# EAGLE board mysz_druk (EAGLE 8.2.1)
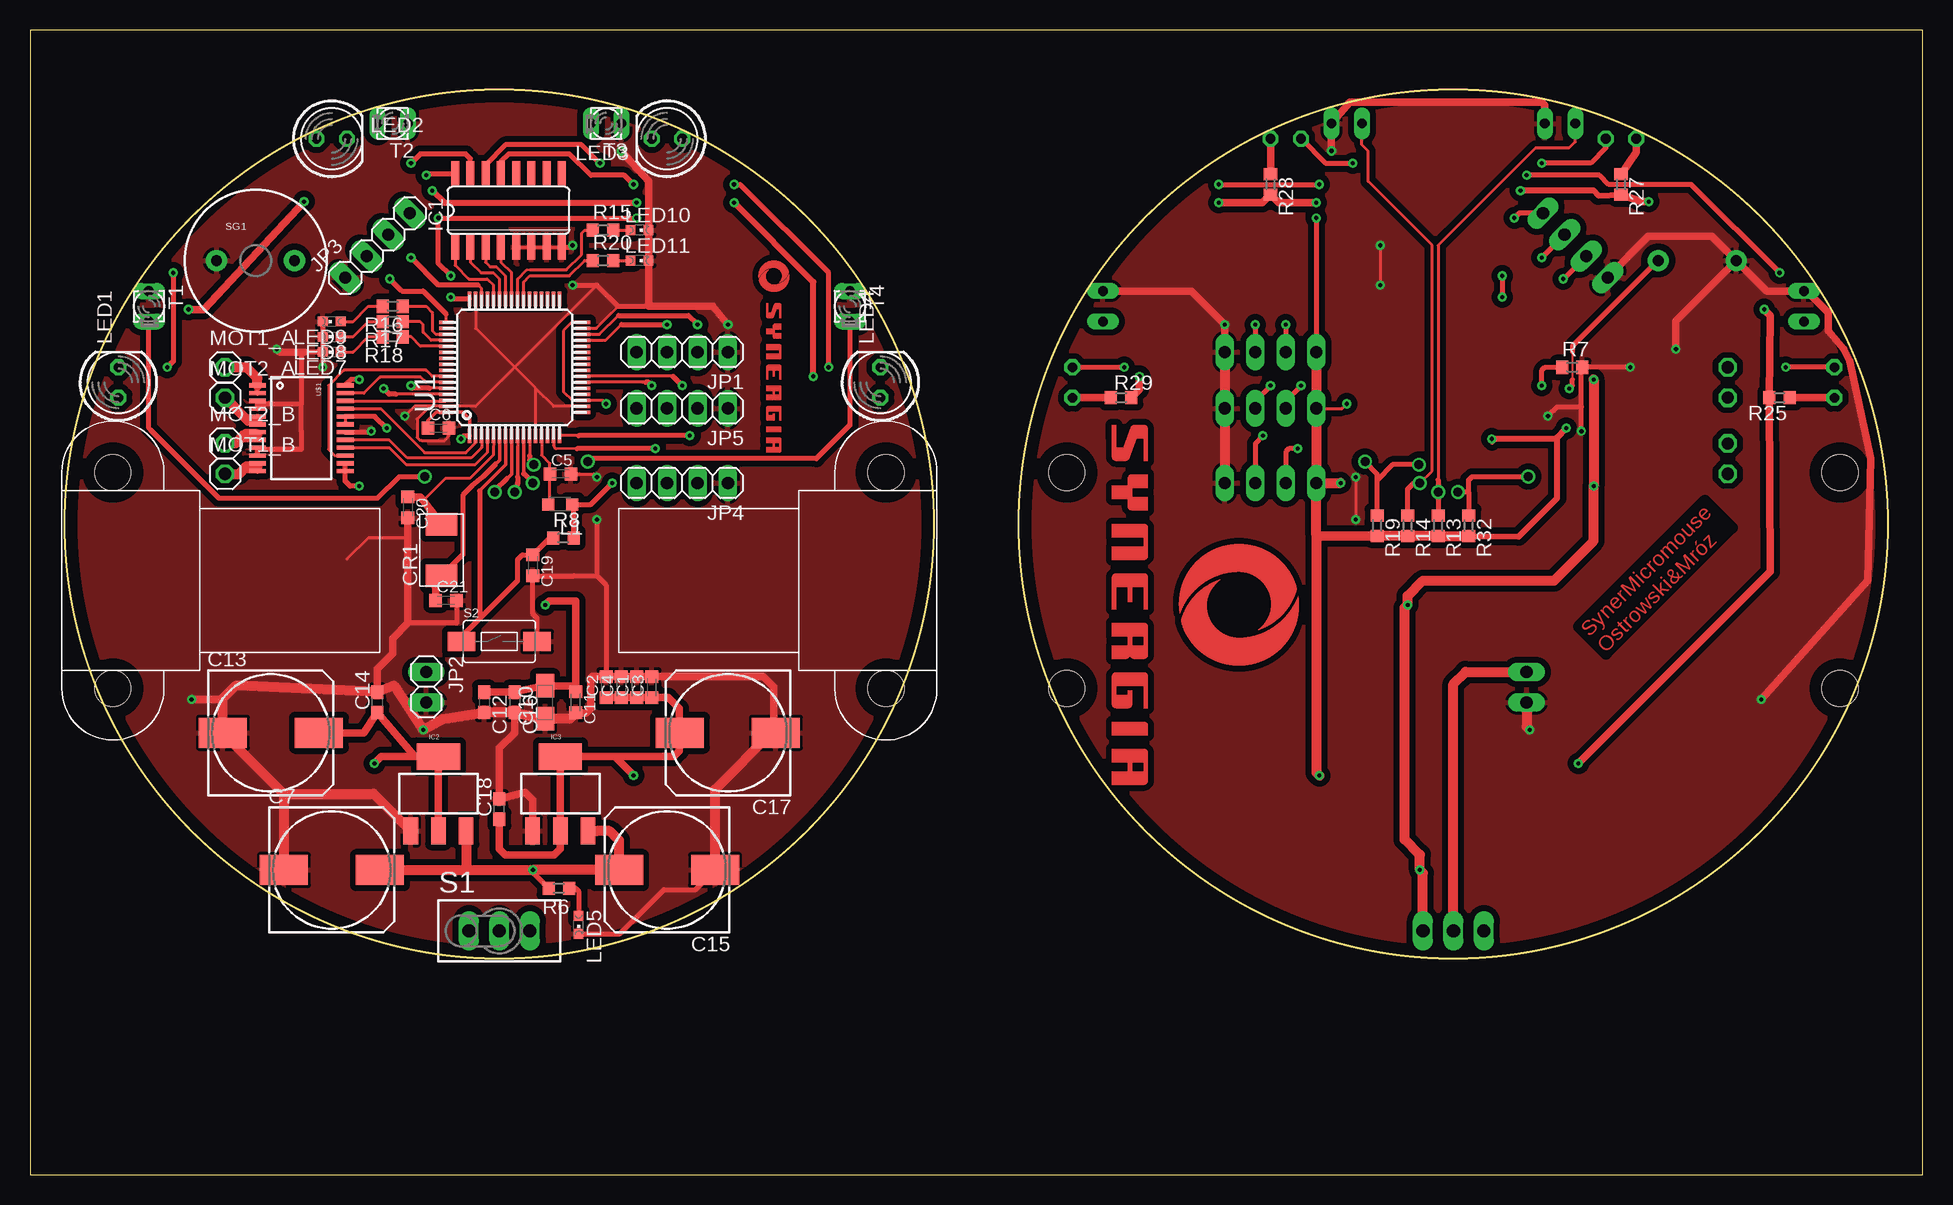
[diagram p0: board, top side]
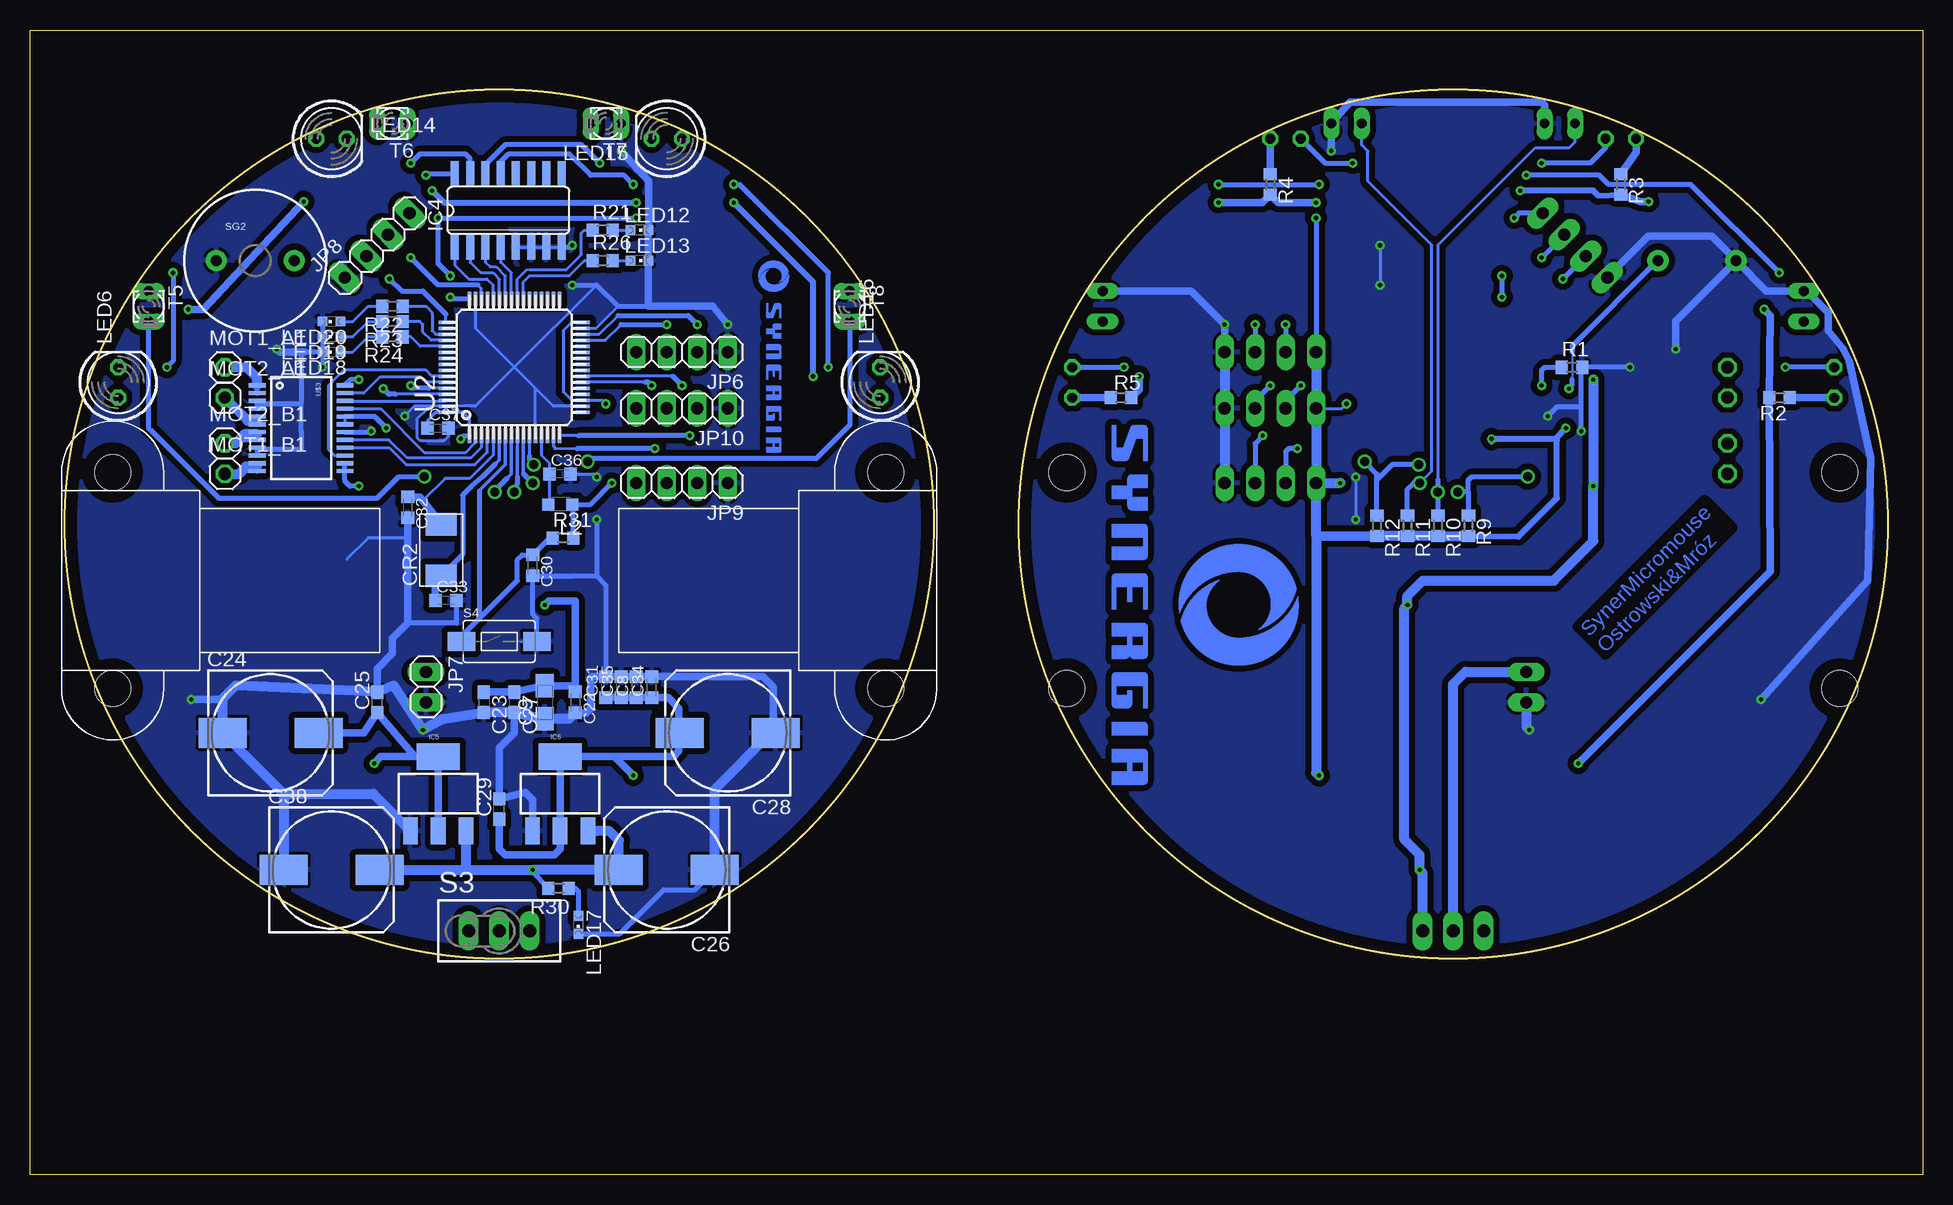
[diagram p1: board, bottom side, seen from below]

Size 157.71 x 95.43 mm. Coordinates in mm from the lower left corner, seen from the top.
Outline: 0,0 157.71,0 157.71,95.43 0,95.43 0,0
Outline: circle at 39.12,54.23 radius 36.22
Outline: circle at 118.62,54.23 radius 36.22
Copper layers (1*16): Top 0.035mm / dielectric 1.5mm / Bottom 0.035mm
Design rules "default": minimum track width 6mil, minimum drill 0.35mm, track to track 6mil, track to pad 6mil, pad to pad 6mil, via to via 6mil, smd to smd 6mil, copper to edge 40mil, drill to drill 6mil, minimum pad ring 10mil, minimum via ring 8mil, stop-mask expansion 4mil, vias tented up to drill 0mil, thermal gap 10mil

## Footprints (pad centres in the part's own frame; a part is rotated, then mirrored left to right if it is on the bottom)
C0603K = smd 1.05 x 1.08: 1 -0.875,0; 2 0.875,0
153CLV-1010 = smd 4 x 2.5: + 4,0; - -4,0
A/3216-18R = smd 1.95 x 1.5: + 1.375,0; - -1.375,0
C0603 = smd 1.1 x 1: 1 -0.85,0; 2 0.85,0
ABM7 = smd 1.9 x 2.6: P$1 -2.15,0; P$2 2.15,0
SO16 = smd 0.66 x 2.032: 1 -4.445,-3.073; 2 -3.175,-3.073; 3 -1.905,-3.073; 4 -0.635,-3.073; 5 0.635,-3.073; 6 1.905,-3.073; 7 3.175,-3.073; 8 4.445,-3.073; 9 4.445,3.073; 10 3.175,3.073; 11 1.905,3.073; 12 0.635,3.073; 13 -0.635,3.073; 14 -1.905,3.073; 15 -3.175,3.073; 16 -4.445,3.073
SOT223 = smd 1.219 x 2.235: 1 -2.311,-3.099; 2 0,-3.099; 3 2.311,-3.099 | smd 3.6 x 2.2: 4 0,3.099
1X04 = drill 1.016 long: 1 -3.81,0; 2 -1.27,0; 3 1.27,0; 4 3.81,0
1X02 = drill 1.016 long: 1 -1.27,0; 2 1.27,0
L2012C = smd 1 x 1: 1 -1,0; 2 1,0
LED5MM = drill 0.813 octagon: A -1.27,0; K 1.27,0
CHIPLED_0603 = smd 0.8 x 0.8: A 0,-0.75; C 0,0.75
1X01 = drill 1.016 octagon: 1 0,0
R0603 = smd 1 x 1.1: 1 -0.85,0; 2 0.85,0
TL3XPO = drill 1.1 pad 1.422 long: 1 -2.54,0; 2 0,0; 3 2.54,0
TACTILE-SWITCH-1101NE = smd 2.3 x 1.6: P$1 -3.15,0; P$2 3.15,0
BUZZER-12MM = drill 0.9 pad 1.778: + 3.25,0; - -3.25,0
BPX81 = drill 0.813 long: C 1.27,0; E -1.27,0
TQFP64 = smd 1.2 x 0.3: 1 -5.7,3.75; 2 -5.7,3.25; 3 -5.7,2.75; 4 -5.7,2.25; 5 -5.7,1.75; 6 -5.7,1.25; 7 -5.7,0.75; 8 -5.7,0.25; 9 -5.7,-0.25; 10 -5.7,-0.75; 11 -5.7,-1.25; 12 -5.7,-1.75; 13 -5.7,-2.25; 14 -5.7,-2.75; 15 -5.7,-3.25; 16 -5.7,-3.75; 33 5.7,-3.75; 34 5.7,-3.25; 35 5.7,-2.75; 36 5.7,-2.25; 37 5.7,-1.75; 38 5.7,-1.25; 39 5.7,-0.75; 40 5.7,-0.25; 41 5.7,0.25; 42 5.7,0.75; 43 5.7,1.25; 44 5.7,1.75; 45 5.7,2.25; 46 5.7,2.75; 47 5.7,3.25; 48 5.7,3.75 | smd 0.3 x 1.2: 17 -3.75,-5.7; 18 -3.25,-5.7; 19 -2.75,-5.7; 20 -2.25,-5.7; 21 -1.75,-5.7; 22 -1.25,-5.7; 23 -0.75,-5.7; 24 -0.25,-5.7; 25 0.25,-5.7; 26 0.75,-5.7; 27 1.25,-5.7; 28 1.75,-5.7; 29 2.25,-5.7; 30 2.75,-5.7; 31 3.25,-5.7; 32 3.75,-5.7; 49 3.75,5.7; 50 3.25,5.7; 51 2.75,5.7; 52 2.25,5.7; 53 1.75,5.7; 54 1.25,5.7; 55 0.75,5.7; 56 0.25,5.7; 57 -0.25,5.7; 58 -0.75,5.7; 59 -1.25,5.7; 60 -1.75,5.7; 61 -2.25,5.7; 62 -2.75,5.7; 63 -3.25,5.7; 64 -3.75,5.7
SSOP24 = smd 0.348 x 1.397: 1 -3.575,-3.656; 2 -2.925,-3.656; 3 -2.275,-3.656; 4 -1.625,-3.656; 5 -0.975,-3.656; 6 -0.325,-3.656; 7 0.325,-3.656; 8 0.975,-3.656; 9 1.625,-3.656; 10 2.275,-3.656; 11 2.925,-3.656; 12 3.575,-3.656; 13 3.575,3.656; 14 2.925,3.656; 15 2.275,3.656; 16 1.625,3.656; 17 0.975,3.656; 18 0.325,3.656; 19 -0.325,3.656; 20 -0.975,3.656; 21 -1.625,3.656; 22 -2.275,3.656; 23 -2.925,3.656; 24 -3.575,3.656
HP_NM = hole 3: -9,-3; 9,-3

## Placement (x,y rotation side)
C1  100nF  [C0603K]  50.55,40.64 90 top
C2  100nF  [C0603K]  48.01,40.64 90 top
C3  100nF  [C0603K]  51.82,40.64 90 top
C4  100nF  [C0603K]  49.28,40.64 90 top
C5  100nF  [C0603K]  44.2,58.42 0 top
C6  100nF  [C0603K]  34.04,62.23 0 top
C7  100uF  [153CLV-1010]  25.15,25.4 0 top
C8  100nF  [C0603K]  107.19,40.64 90 bottom
C9  10uF  [A/3216-18R]  114.81,39.37 90 bottom
C10  10uF  [A/3216-18R]  42.93,39.37 90 top
C11  100nF  [C0603K]  45.47,39.37 270 top
C12  100nF  [C0603]  37.85,39.37 270 top
C13  33uF  [153CLV-1010]  20.07,36.83 0 top
C14  100nF  [C0603]  28.96,39.37 90 top
C15  47uF  [153CLV-1010]  53.09,25.4 180 top
C16  100nF  [C0603]  40.39,39.37 270 top
C17  10uF  [153CLV-1010]  58.17,36.83 180 top
C18  100nF  [C0603]  39.12,30.48 90 top
C19  100nF  [C0603K]  41.91,50.8 270 top
C20  20pF  [C0603K]  31.5,55.63 270 top
C21  20pF  [C0603K]  34.67,47.88 0 top
C22  100nF  [C0603K]  112.27,39.37 270 bottom
C23  100nF  [C0603]  119.89,39.37 270 bottom
C24  33uF  [153CLV-1010]  137.67,36.83 0 bottom
C25  100nF  [C0603]  128.78,39.37 90 bottom
C26  47uF  [153CLV-1010]  104.65,25.4 180 bottom
C27  100nF  [C0603]  117.35,39.37 270 bottom
C28  10uF  [153CLV-1010]  99.57,36.83 180 bottom
C29  100nF  [C0603]  118.62,30.48 90 bottom
C30  100nF  [C0603K]  115.82,50.8 270 bottom
C31  100nF  [C0603K]  109.73,40.64 90 bottom
C32  20pF  [C0603K]  126.24,55.63 270 bottom
C33  20pF  [C0603K]  123.06,47.88 0 bottom
C34  100nF  [C0603K]  105.92,40.64 90 bottom
C35  100nF  [C0603K]  108.46,40.64 90 bottom
C36  100nF  [C0603K]  113.54,58.42 0 bottom
C37  100nF  [C0603K]  123.7,62.23 0 bottom
C38  100uF  [153CLV-1010]  132.59,25.4 0 bottom
CR1  8MHz  [ABM7]  34.29,52.07 90 top
CR2  8MHz  [ABM7]  123.44,52.07 90 bottom
IC1  ULN2003AD  [SO16]  39.88,80.39 0 top
IC2  [SOT223]  34.04,31.75 0 top
IC3  [SOT223]  44.2,31.75 0 top
IC4  ULN2003AD  [SO16]  117.86,80.39 0 bottom
IC5  [SOT223]  123.7,31.75 0 bottom
IC6  [SOT223]  113.54,31.75 0 bottom
JP1  [1X04]  54.36,68.58 180 top
JP2  [1X02]  33.02,40.64 270 top
JP3  [1X04]  28.96,77.47 45 top
JP4  [1X04]  54.36,57.66 180 top
JP5  [1X04]  54.36,63.88 180 top
JP6  [1X04]  103.38,68.58 180 bottom
JP7  [1X02]  124.71,40.64 270 bottom
JP8  [1X04]  128.78,77.47 45 bottom
JP9  [1X04]  103.38,57.66 180 bottom
JP10  [1X04]  103.38,63.88 180 bottom
L1  10uH  [L2012C]  44.2,55.88 180 top
L2  10uH  [L2012C]  113.54,55.88 180 bottom
LED1  [LED5MM]  7.37,66.04 90 top
LED2  [LED5MM]  25.15,86.36 0 top
LED3  [LED5MM]  53.09,86.36 180 top
LED4  [LED5MM]  70.87,66.04 90 top
LED5  [CHIPLED_0603]  45.72,20.83 180 top
LED6  [LED5MM]  150.37,66.04 90 bottom
LED7  [CHIPLED_0603]  25.15,68.58 90 top
LED8  [CHIPLED_0603]  25.15,69.85 90 top
LED9  [CHIPLED_0603]  25.15,71.12 90 top
LED10  [CHIPLED_0603]  50.8,78.74 270 top
LED11  [CHIPLED_0603]  50.8,76.2 270 top
LED12  [CHIPLED_0603]  106.93,78.74 270 bottom
LED13  [CHIPLED_0603]  106.93,76.2 270 bottom
LED14  [LED5MM]  132.59,86.36 0 bottom
LED15  [LED5MM]  104.65,86.36 180 bottom
LED16  [LED5MM]  86.87,66.04 90 bottom
LED17  [CHIPLED_0603]  112.01,20.83 180 bottom
LED18  [CHIPLED_0603]  132.59,68.58 90 bottom
LED19  [CHIPLED_0603]  132.59,69.85 90 bottom
LED20  [CHIPLED_0603]  132.59,71.12 90 bottom
MOT1_A  [1X01]  16.26,67.31 0 top
MOT1_A1  [1X01]  141.48,67.31 0 bottom
MOT1_B  [1X01]  16.26,58.42 0 top
MOT1_B1  [1X01]  141.48,58.42 0 bottom
MOT2_A  [1X01]  16.26,64.77 0 top
MOT2_A1  [1X01]  141.48,64.77 0 bottom
MOT2_B  [1X01]  16.26,60.96 0 top
MOT2_B1  [1X01]  141.48,60.96 0 bottom
R1  100k  [R0603]  29.21,67.31 0 bottom
R2  100R  [R0603]  11.94,64.77 180 bottom
R3  100R  [R0603]  25.15,82.55 270 bottom
R4  100R  [R0603]  54.36,82.55 270 bottom
R5  100R  [R0603]  66.8,64.77 0 bottom
R6  1.1k  [R0603]  44.07,23.88 180 top
R7  100k  [R0603]  128.52,67.31 0 top
R8  100k  [R0603]  44.45,53.09 0 top
R9  22k  [R0603]  37.85,54.1 270 bottom
R10  22k  [R0603]  40.39,54.1 270 bottom
R11  22k  [R0603]  42.93,54.1 270 bottom
R12  22k  [R0603]  45.47,54.1 270 bottom
R13  22k  [R0603]  117.35,54.1 270 top
R14  22k  [R0603]  114.81,54.1 270 top
R15  680R  [R0603]  47.75,78.74 0 top
R16  680R  [R0603]  30.23,72.39 180 top
R17  680R  [R0603]  30.23,71.12 180 top
R18  680R  [R0603]  30.23,69.85 180 top
R19  22k  [R0603]  112.27,54.1 270 top
R20  680R  [R0603]  47.75,76.2 0 top
R21  680R  [R0603]  109.98,78.74 0 bottom
R22  680R  [R0603]  127.51,72.39 180 bottom
R23  680R  [R0603]  127.51,71.12 180 bottom
R24  680R  [R0603]  127.51,69.85 180 bottom
R25  100R  [R0603]  145.8,64.77 180 top
R26  680R  [R0603]  109.98,76.2 0 bottom
R27  100R  [R0603]  132.59,82.55 270 top
R28  100R  [R0603]  103.38,82.55 270 top
R29  100R  [R0603]  90.93,64.77 0 top
R30  1.1k  [R0603]  113.67,23.88 180 bottom
R31  100k  [R0603]  113.28,53.09 0 bottom
R32  22k  [R0603]  119.89,54.1 270 top
S1  TL32PO  [TL3XPO]  39.12,20.32 0 top
S2  SWITCH-MOMENTARY-2-SMD-1101NE  [TACTILE-SWITCH-1101NE]  39.12,44.45 0 top
S3  TL32PO  [TL3XPO]  118.62,20.32 0 bottom
S4  SWITCH-MOMENTARY-2-SMD-1101NE  [TACTILE-SWITCH-1101NE]  118.62,44.45 0 bottom
SG1  BUZZERPTH  [BUZZER-12MM]  18.8,76.2 0 top
SG2  BUZZERPTH  [BUZZER-12MM]  138.94,76.2 0 bottom
T1  BPX81  [BPX81]  9.91,72.39 270 top
T2  BPX81  [BPX81]  30.23,87.63 180 top
T3  BPX81  [BPX81]  48.01,87.63 180 top
T4  BPX81  [BPX81]  68.33,72.39 270 top
T5  BPX81  [BPX81]  147.83,72.39 270 bottom
T6  BPX81  [BPX81]  127.51,87.63 180 bottom
T7  BPX81  [BPX81]  109.73,87.63 180 bottom
T8  BPX81  [BPX81]  89.41,72.39 270 bottom
U1  STM32F10XRXT6  [TQFP64]  40.39,67.31 90 top
U2  STM32F10XRXT6  [TQFP64]  117.35,67.31 90 bottom
U$1  TB6621FNG  [SSOP24]  22.61,62.23 270 top
U$2  [SYNERGIA_LOGO_V_30MM]  67.56,47.5 270 bottom
U$3  TB6621FNG  [SSOP24]  135.13,62.23 270 bottom
U$4  [HP_NM]  9.91,49.53 270 top
U$5  [HP_NM]  68.33,49.53 90 top
U$6  [SYNERGIA_LOGO_H_16MM]  61.98,74.93 270 top
U$7  [HP_NM]  147.83,49.53 270 bottom
U$8  [HP_NM]  89.41,49.53 90 bottom
U$9  [SYNERGIA_LOGO_V_30MM]  90.17,47.5 270 top
U$10  [SYNERGIA_LOGO_H_16MM]  95.76,74.93 270 bottom

## Library data of the parts
C1-C6 C8 C11 C19-C22 C30-C37 R1 R6-R8 R15-R18 R20-R24 R26 R30 R31 = resistor
C7 C9 C10 C12-C18 C23-C29 C38 L1 L2 R2-R5 R9-R14 R19 R25 R27-R29 R32 = rcl
CR1 CR2 = crystal_scorpio
IC1 IC4 = uln-udn
IC2 IC3 IC5 IC6 S2 S4 SG1 SG2 U$1 U$3 = SparkFun
JP1-JP10 MOT1_A MOT1_A1 MOT1_B MOT1_B1 MOT2_A MOT2_A1 MOT2_B MOT2_B1 = pinhead
LED1-LED20 = led
S1 S3 = switch
T1-T8 = opto-trans-siemens; OC_FARNELL: unknown; OC_NEWARK: unknown
U1 U2 = stm32
U$2 U$6 U$9 U$10 = synergia_logo
U$4 U$5 U$7 U$8 = PololuMG_v2

## Nets
+3V1: C8.1 C28.+ C29.1 C31.1 C34.1 C35.1 C37.1 IC6.2 IC6.4 JP6.4 JP8.4 JP9.4 JP10.4 L2.1 R13.2 R14.2 R19.2 R31.2 R32.2 U2.1 U2.19 U2.32 U2.48 U2.64 U$3.19 U$3.20
+3V3: C1.1 C2.1 C3.1 C4.1 C6.1 C17.+ C18.1 IC3.2 IC3.4 JP1.4 JP3.4 JP4.4 JP5.4 L1.1 R8.2 R9.2 R10.2 R11.2 R12.2 U1.1 U1.19 U1.32 U1.48 U1.64 U$1.19 U$1.20
+5V: C13.+ C14.1 IC2.2 IC2.4 R2.2 R3.2 R4.2 R5.2
+5V1: C24.+ C25.1 IC5.2 IC5.4 R25.2 R27.2 R28.2 R29.2
BAT+: JP2.1 S1.2
BAT+1: JP7.1 S3.2
BUZZER: SG1.+ U1.61
BUZZER1: SG2.+ U2.61
CZ1: IC1.1 U1.44
CZ1_OUT: R9.1 T1.C U1.8
CZ1_OUT1: R32.1 T5.C U2.8
CZ2: IC1.2 U1.43
CZ2_OUT: R10.1 T2.C U1.9
CZ2_OUT1: R13.1 T6.C U2.9
CZ3: IC1.3 U1.42
CZ3_OUT: R11.1 T3.C U1.10
CZ3_OUT1: R14.1 T7.C U2.10
CZ4: IC1.4 U1.41
CZ4_OUT: R12.1 T4.C U1.11
CZ4_OUT1: R19.1 T8.C U2.11
CZ5: IC4.1 U2.44
CZ6: IC4.2 U2.43
CZ7: IC4.3 U2.42
CZ8: IC4.4 U2.41
ENC1_A: JP4.3 U1.15
ENC1_A1: JP9.3 U2.15
ENC1_B: JP4.2 U1.16
ENC1_B1: JP9.2 U2.16
ENC2_A: JP5.3 U1.22
ENC2_A1: JP10.3 U2.22
ENC2_B: JP5.2 U1.23
ENC2_B1: JP10.2 U2.23
GND: C1.2 C2.2 C3.2 C4.2 C5.2 C6.2 C7.- C10.- C11.2 C12.2 C13.- C14.2 C15.- C16.2 C17.- C18.2 C19.2 C20.2 C21.2 IC1.5 IC1.6 IC1.7 IC1.8 IC2.1 IC3.1 JP1.1 JP2.2 JP3.1 JP4.1 JP5.1 LED5.C LED7.C LED8.C LED9.C LED10.C LED11.C R1.2 S2.P$2 SG1.- T1.E T2.E T3.E T4.E U1.12 U1.18 U1.31 U1.47 U1.63 U$1.3 U$1.4 U$1.9 U$1.10 U$1.18
GND1: C8.2 C9.- C22.2 C23.2 C24.- C25.2 C26.- C27.2 C28.- C29.2 C30.2 C31.2 C32.2 C33.2 C34.2 C35.2 C36.2 C37.2 C38.- IC4.5 IC4.6 IC4.7 IC4.8 IC5.1 IC6.1 JP6.1 JP7.2 JP8.1 JP9.1 JP10.1 LED12.C LED13.C LED17.C LED18.C LED19.C LED20.C R7.2 S4.P$2 SG2.- T5.E T6.E T7.E T8.E U2.12 U2.18 U2.31 U2.47 U2.63 U$3.3 U$3.4 U$3.9 U$3.10 U$3.18
IN1_A: U1.2 U$1.21
IN1_A1: U2.2 U$3.21
IN1_B: U1.3 U$1.17
IN1_B1: U2.3 U$3.17
IN2_A: U1.62 U$1.22
IN2_A1: U2.62 U$3.22
IN2_B: U1.4 U$1.16
IN2_B1: U2.4 U$3.16
LED1: R20.1 U1.39
LED2: R15.1 U1.40
LED3: R16.1 U1.51
LED4: R17.1 U1.52
LED5: R18.1 U1.53
LED6: R21.1 U2.40
LED7: R22.1 U2.51
LED8: R23.1 U2.52
LED9: R24.1 U2.53
LED10: R26.1 U2.39
N$1: R1.1 U1.60
N$2: C5.1 L1.2 U1.13
N$3: LED7.A R18.2
N$4: LED8.A R17.2
N$5: LED9.A R16.2
N$6: LED10.A R15.2
N$7: LED5.A R6.1
N$8: IC1.16 LED1.K
N$9: MOT1_A.1 U$1.1 U$1.2
N$10: MOT2_A.1 U$1.5 U$1.6
N$11: MOT2_B.1 U$1.7 U$1.8
N$12: MOT1_B.1 U$1.11 U$1.12
N$13: IC1.15 LED2.K
N$14: IC1.14 LED3.K
N$15: IC1.13 LED4.K
N$16: R7.1 U2.60
N$17: LED1.A R2.1
N$18: LED2.A R3.1
N$19: LED3.A R4.1
N$20: LED4.A R5.1
N$21: C36.1 L2.2 U2.13
N$22: MOT1_A1.1 U$3.1 U$3.2
N$23: C20.1 CR1.P$2 U1.5
N$24: C21.1 CR1.P$1 U1.6
N$25: MOT2_A1.1 U$3.5 U$3.6
N$26: LED11.A R20.2
N$27: MOT2_B1.1 U$3.7 U$3.8
N$28: MOT1_B1.1 U$3.11 U$3.12
N$29: IC4.16 LED6.K
N$30: IC4.15 LED14.K
N$31: IC4.14 LED15.K
N$32: IC4.13 LED16.K
N$33: LED6.A R25.1
N$34: LED14.A R27.1
N$35: LED15.A R28.1
N$36: LED16.A R29.1
N$37: C32.1 CR2.P$2 U2.5
N$38: C33.1 CR2.P$1 U2.6
N$39: LED18.A R24.2
N$40: LED19.A R23.2
N$41: LED20.A R22.2
N$42: LED12.A R21.2
N$43: LED13.A R26.2
N$44: LED17.A R30.1
PWM_A: U1.59 U$1.23
PWM_A1: U2.59 U$3.23
PWM_B: U1.58 U$1.15
PWM_B1: U2.58 U$3.15
RESET: C19.1 R8.1 S2.P$1 U1.7
RESET1: C30.1 R31.1 S4.P$1 U2.7
RX: JP1.2 U1.30
RX1: JP6.2 U2.30
SWCLK: JP3.2 U1.49
SWCLK1: JP8.2 U2.49
SWDIO: JP3.3 U1.46
SWDIO1: JP8.3 U2.46
TX: JP1.3 U1.29
TX1: JP6.3 U2.29
V+: C7.+ C10.+ C11.1 C12.1 C15.+ C16.1 IC2.3 IC3.3 R6.2 S1.3 U$1.13 U$1.14 U$1.24
V+1: C9.+ C22.1 C23.1 C26.+ C27.1 C38.+ IC5.3 IC6.3 R30.2 S3.3 U$3.13 U$3.14 U$3.24

## Tracks (layer width: path | path; a pad name or v marks a point on that pad's centre or on a via)
+3V1  (via drill 0.35)
  Top 0.152: 120.65,53.19 R32.2
  Top 0.254: JP10.4 109.35,63.88 v109.73,64.26
  Top 0.406: v121.82,61.34 121.82,61.06 | 121.26,53.19 120.65,53.19 | v122.68,74.93 v122.68,73.15 | JP8.4 124.11,80.16 v123.7,79.76 | v107.19,79.76 JP6.4
  Top 0.508: R32.2 124.05,53.19 127.25,56.39 127.25,61.21 | 127.25,61.21 127.13,61.34 | 127.13,61.34 v128.02,62.23 127.25,61.47 127.25,61.21 | 127.13,61.34 v121.82,61.34
  Top 0.813: JP6.4 JP10.4 JP9.4 | 107.19,53.34 JP9.4 | 107.19,53.34 107.19,33.53 v107.44,33.27 | JP9.4 v109.22,57.66 | R32.2 R13.2 R14.2 R19.2 107.34,53.19 107.19,53.34
  Bottom 0.152: 122.54,73.01 v122.68,73.15
  Bottom 0.254: U2.32 112.58,71.06 113.28,70.36 113.28,65.28 112.57,64.56 U2.19 110.03,64.56 v109.73,64.26 | U$3.20 U$3.19
  Bottom 0.305: U2.1 121.1,62.99 121.67,63.56 U2.64 123.89,63.56 124.57,62.88 C37.1
  Bottom 0.406: U2.1 121.55,61.61 v121.82,61.34 | v109.22,57.66 111,55.88 L2.1 112.43,55.78 R31.2 | U2.48 122.54,73.01 | v122.68,74.93 123.7,75.95 v123.7,79.76 v107.19,79.76 | U$3.20 128.99,63.2 v128.02,62.23
  Bottom 0.61: C31.1 C35.1 C8.1 C34.1 104.53,39.77 103.63,38.86 103.63,36.89 C28.+ 103.63,36.77 103.63,35.31 104.09,34.85 IC6.4 | C29.1 118.62,27.18 118.11,26.67 114.05,26.67 113.54,27.18 IC6.2 IC6.4 | IC6.4 109.02,34.85 v107.44,33.27
+3V3  (via drill 0.35)
  Top 0.152: 35.19,73.01 v35.05,73.15
  Top 0.254: U1.32 45.15,71.06 44.45,70.36 44.45,65.28 45.17,64.56 U1.19 47.71,64.56 v48.01,64.26 | U$1.20 U$1.19
  Top 0.305: U1.1 36.64,62.99 36.07,63.56 U1.64 33.84,63.56 33.16,62.88 C6.1
  Top 0.406: U1.1 36.19,61.61 v35.92,61.34 | v48.51,57.66 46.74,55.88 L1.1 45.3,55.78 R8.2 | U1.48 35.19,73.01 | v35.05,74.93 34.04,75.95 v34.04,79.76 v50.55,79.76 | U$1.20 28.74,63.2 v29.72,62.23
  Top 0.61: C2.1 C4.1 C1.1 C3.1 53.2,39.77 54.1,38.86 54.1,36.89 C17.+ 54.1,36.77 54.1,35.31 53.65,34.85 IC3.4 | C18.1 39.12,27.18 39.62,26.67 43.69,26.67 44.2,27.18 IC3.2 IC3.4 | IC3.4 48.72,34.85 v50.29,33.27
  Bottom 0.152: 37.08,53.19 R9.2
  Bottom 0.254: JP5.4 48.39,63.88 v48.01,64.26
  Bottom 0.406: v35.92,61.34 35.92,61.06 | 36.47,53.19 37.08,53.19 | v35.05,74.93 v35.05,73.15 | JP3.4 33.63,80.16 v34.04,79.76 | v50.55,79.76 JP1.4
  Bottom 0.508: R9.2 33.68,53.19 30.48,56.39 30.48,61.21 | 30.48,61.21 30.61,61.34 | 30.61,61.34 v29.72,62.23 30.48,61.47 30.48,61.21 | 30.61,61.34 v35.92,61.34
  Bottom 0.813: JP1.4 JP5.4 JP4.4 | 50.55,53.34 JP4.4 | 50.55,53.34 50.55,33.53 v50.29,33.27 | JP4.4 v48.51,57.66 | R9.2 R10.2 R11.2 R12.2 50.39,53.19 50.55,53.34
+5V  (via drill 0.35)
  Top 0.508: v33.53,82.04 34.54,81.03 v50.55,81.03 | v58.67,81.03 65.28,74.42 v65.28,66.55
  Top 0.61: C13.+ 27.82,36.83 C14.1 32.08,34.85 IC2.4 | IC2.2 IC2.4 | IC2.4 29.26,34.85 v28.7,34.29 | v13.21,72.14 14.48,72.14 v22.84,81.13
  Bottom 0.254: 50.65,81.13 v50.55,81.03
  Bottom 0.508: R3.2 27.03,81.64 27.43,82.04 v33.53,82.04 | 58.57,81.13 v58.67,81.03
  Bottom 0.61: v28.7,34.29 12.7,50.29 R2.2 12.7,71.63 v13.21,72.14 | R3.2 23.47,81.13 v22.84,81.13 | v58.67,81.03 55.03,81.03 R4.2 53.68,81.03 v50.55,81.03 | v65.28,66.55 65.28,65.44 R5.2
+5V1  (via drill 0.35)
  Top 0.254: 107.09,81.13 v107.19,81.03
  Top 0.508: R27.2 130.71,81.64 130.3,82.04 v124.21,82.04 | 99.16,81.13 v99.06,81.03
  Top 0.61: v129.03,34.29 145.03,50.29 R25.2 145.03,71.63 v144.53,72.14 | R27.2 134.26,81.13 v134.9,81.13 | v99.06,81.03 102.7,81.03 R28.2 104.05,81.03 v107.19,81.03 | v92.46,66.55 92.46,65.44 R29.2
  Bottom 0.508: v124.21,82.04 123.19,81.03 v107.19,81.03 | v99.06,81.03 92.46,74.42 v92.46,66.55
  Bottom 0.61: C24.+ 129.92,36.83 C25.1 125.66,34.85 IC5.4 | IC5.2 IC5.4 | IC5.4 128.47,34.85 v129.03,34.29 | v144.53,72.14 143.26,72.14 v134.9,81.13
BAT+
  Bottom 0.813: S1.2 39.12,40.89 38.1,41.91 JP2.1
BAT+1
  Top 0.813: S3.2 118.62,40.89 119.63,41.91 JP7.1
BUZZER  (via drill 0.35)
  Top 0.254: U1.61 30.48,65.06
  Top 0.406: v29.46,65.53 29.94,65.06 30.48,65.06
  Bottom 0.152: 29.21,68.58 29.21,66.29
  Bottom 0.406: v29.46,65.53 29.21,65.79 29.21,66.29 | SG1.+ 22.1,76.2 29.21,69.09 29.21,68.58
BUZZER1  (via drill 0.35)
  Top 0.152: 128.52,68.58 128.52,66.29
  Top 0.406: v128.27,65.53 128.52,65.79 128.52,66.29 | SG2.+ 135.64,76.2 128.52,69.09 128.52,68.58
  Bottom 0.254: U2.61 127.25,65.06
  Bottom 0.406: v128.27,65.53 127.8,65.06 127.25,65.06
CZ1
  Top 0.254: U1.44 38.64,74.14 38.1,74.68 36.58,74.68 35.43,75.82 IC1.1
CZ1_OUT  (via drill 0.75)
  Top 0.152: 10.03,62.1 9.91,62.23
  Top 0.305: U1.8 40.14,58.42 39.75,58.04
  Top 0.406: v32.89,58.19 30.76,58.19 28.96,56.39 15.75,56.39 10.03,62.1 | 9.91,62.23 T1.C | v38.73,56.9 38.73,57.02 39.75,58.04
  Bottom 0.406: v32.89,58.19 37.57,58.19 37.85,57.91 37.85,56.9 | 37.85,56.9 v38.73,56.9 | 37.85,56.9 R9.1
CZ1_OUT1  (via drill 0.75)
  Top 0.406: v124.84,58.19 120.17,58.19 119.89,57.91 119.89,56.9 | 119.89,56.9 v119,56.9 | 119.89,56.9 R32.1
  Bottom 0.152: 147.7,62.1 147.83,62.23
  Bottom 0.305: U2.8 117.6,58.42 117.98,58.04
  Bottom 0.406: v124.84,58.19 126.97,58.19 128.78,56.39 141.99,56.39 147.7,62.1 | 147.83,62.23 T5.C | v119,56.9 119,57.02 117.98,58.04
CZ2
  Top 0.254: U1.43 39.14,74.66 38.61,75.18 37.59,75.18 36.7,76.07 IC1.2
CZ2_OUT  (via drill 0.75)
  Top 0.254: U1.9 40.64,60.71
  Top 0.305: 40.64,60.71 40.64,58.17
  Top 0.406: v40.39,56.9 40.64,57.66 40.64,58.17
  Bottom 0.254: 40.39,57.91 40.39,77.47 32.26,85.6 29.46,85.6 28.96,86.11 T2.C
  Bottom 0.406: R10.1 v40.39,56.9 40.39,57.91
CZ2_OUT1  (via drill 0.75)
  Top 0.254: 117.35,57.91 117.35,77.47 125.48,85.6 128.27,85.6 128.78,86.11 T6.C
  Top 0.406: R13.1 v117.35,56.9 117.35,57.91
  Bottom 0.254: U2.9 117.1,60.71
  Bottom 0.305: 117.1,60.71 117.1,58.17
  Bottom 0.406: v117.35,56.9 117.09,57.66 117.1,57.66 117.1,58.17
CZ3
  Top 0.254: U1.42 39.64,74.92 38.86,75.69 38.35,75.69 37.97,76.07 IC1.3
CZ3_OUT  (via drill 0.75)
  Top 0.305: U1.10 41.14,58.43
  Top 0.406: 41.14,58.43 v41.91,57.66
  Bottom 0.254: T3.C 46.74,85.85 46.23,85.34 46.23,82.8 40.89,77.47 40.89,58.67 v41.91,57.66
  Bottom 0.406: R11.1 42.93,57.15 42.42,57.66 v41.91,57.66
CZ3_OUT1  (via drill 0.75)
  Top 0.254: T7.C 111,85.85 111.51,85.34 111.51,82.8 116.84,77.47 116.84,58.67 v115.82,57.66
  Top 0.406: R14.1 114.81,57.15 115.32,57.66 v115.82,57.66
  Bottom 0.305: U2.10 116.6,58.43
  Bottom 0.406: 116.6,58.43 v115.82,57.66
CZ4
  Top 0.254: U1.41 40.14,75.18 39.24,76.07 IC1.4
CZ4_OUT  (via drill 0.75)
  Top 0.254: U1.11 41.64,59.94
  Top 0.406: 41.64,59.94 41.64,59.53 v41.99,59.18 | T4.C 68.33,62.48 65.53,59.69 46.74,59.69 v46.48,59.44
  Bottom 0.254: R12.1 45.47,57.91 45.47,58.42
  Bottom 0.406: v41.99,59.18 44.2,59.18 45.47,57.91 | R12.1 45.47,58.42 v46.48,59.44
CZ4_OUT1  (via drill 0.75)
  Top 0.254: R19.1 112.27,57.91 112.27,58.42
  Top 0.406: v115.75,59.18 113.54,59.18 112.27,57.91 | R19.1 112.27,58.42 v111.25,59.44
  Bottom 0.254: U2.11 116.1,59.94
  Bottom 0.406: 116.1,59.94 116.1,59.53 v115.75,59.18 | T8.C 89.41,62.48 92.2,59.69 111,59.69 v111.25,59.44
CZ5
  Bottom 0.254: U2.44 119.1,74.14 119.63,74.68 121.16,74.68 122.3,75.82 IC4.1
CZ6
  Bottom 0.254: U2.43 118.6,74.66 119.13,75.18 120.14,75.18 121.03,76.07 IC4.2
CZ7
  Bottom 0.254: U2.42 118.1,74.92 118.87,75.69 119.38,75.69 119.76,76.07 IC4.3
CZ8
  Bottom 0.254: U2.41 117.6,75.18 118.49,76.07 IC4.4
ENC1_A  (via drill 0.35)
  Top 0.254: U1.15 43.64,60.81 43.81,60.5 45.59,60.53
  Top 0.406: v52.09,60.53 45.59,60.53
  Bottom 0.152: JP4.3 53.09,57.91
  Bottom 0.406: v52.09,60.53 52.83,60.53 53.09,60.27 JP4.3
ENC1_A1  (via drill 0.35)
  Top 0.152: JP9.3 104.65,57.91
  Top 0.406: v105.64,60.53 104.9,60.53 104.65,60.27 JP9.3
  Bottom 0.254: U2.15 114.1,60.81 113.92,60.5 112.14,60.53
  Bottom 0.406: v105.64,60.53 112.14,60.53
ENC1_B  (via drill 0.35)
  Top 0.254: 45.72,61.61 U1.16
  Top 0.406: 45.72,61.61 v54.98,61.61 v54.99,61.62
  Bottom 0.406: v54.99,61.62 54.99,61.59 55.63,60.96 JP4.2
ENC1_B1  (via drill 0.35)
  Top 0.406: v102.74,61.62 102.74,61.59 102.11,60.96 JP9.2
  Bottom 0.254: 112.01,61.61 U2.16
  Bottom 0.406: 112.01,61.61 102.75,61.61 v102.74,61.62
ENC2_A  (via drill 0.35)
  Top 0.254: 51.31,66.06 51.05,66.06 U1.22
  Top 0.406: v51.82,65.79 51.54,66.06 51.31,66.06
  Bottom 0.406: JP5.3 53.09,64.52 v51.82,65.79
ENC2_A1  (via drill 0.35)
  Top 0.406: JP10.3 104.65,64.52 v105.92,65.79
  Bottom 0.254: 106.43,66.06 106.68,66.06 U2.22
  Bottom 0.406: v105.92,65.79 106.19,66.06 106.43,66.06
ENC2_B  (via drill 0.35)
  Top 0.254: 53.58,66.56 U1.23
  Top 0.406: v54.36,65.79 53.58,66.56
  Bottom 0.406: JP5.2 55.63,64.52 v54.36,65.79
ENC2_B1  (via drill 0.35)
  Top 0.406: JP10.2 102.11,64.52 v103.38,65.79
  Bottom 0.254: 104.15,66.56 U2.23
  Bottom 0.406: v103.38,65.79 104.15,66.56
GND  (via drill 0.35)
  Top 0.152: 40.39,67.31 42.16,65.53 42.14,65.5 U1.12 | U1.63 33.33,64.06 | 33.33,64.06 33.15,63.88 | 32.51,61.21 32.64,61.21 | 33.33,64.06 32.06,64.06
  Top 0.254: U1.47 37.14,70.56 40.39,67.31 | 40.39,67.31 37.14,64.06 U1.63 32.06,64.06 v31.24,63.25 | U1.12 42.14,65.56 40.39,67.31 | U1.18 43.64,64.06 42.16,65.53 | 22.68,61.91 22.61,61.98 | IC1.5 IC1.6 IC1.7 IC1.8 | 51.56,72.39 49.02,72.39 47.19,70.56 U1.31 | C5.2 46.99,58.42 v47.24,58.17 | 40.39,67.31 47.24,74.17 | 31.5,53.09 28.19,53.09 26.42,51.31 | 33.15,63.88 32.26,62.99 32.26,61.47 32.51,61.21 | 32.64,61.21 34.54,61.21 34.91,61.58 C6.2
  Top 0.406: LED9.C LED8.C LED7.C | U$1.3 18.95,64.26 | 18.95,64.26 U$1.4 | U$1.9 18.95,60.45 | 18.95,60.45 U$1.10 | 18.95,64.26 22.61,64.26 | 18.95,60.45 22.61,60.45 22.61,61.98 22.61,64.26 | LED7.C 22.86,68.58 22.61,68.33 22.61,64.26 | v47.24,54.61 47.24,49.94 | C2.2 48.01,49.15 47.24,49.94 | IC1.8 45.06,77.32 v45.21,77.47 | v45.21,74.17 47.24,74.17 49.02,72.39 52.07,72.39 | U$1.18 28.38,61.91 v28.45,61.98 | LED7.C 24.4,67.32 v24.38,67.31 | C21.2 35.55,47.48 35.56,45.97 31.5,45.97 | S2.P$2 42.27,46.38 41.91,46.74 C19.2 45.35,49.92 47.24,49.94 | LED5.C 49.16,20.08 52.83,23.75 55.44,23.75 C15.-
  Top 0.61: C11.2 46.37,38.49 46.74,38.86 46.74,41.4 46.85,41.52 C2.2 C4.2 C1.2 C3.2 61.1,41.52 61.98,40.64 61.98,37.02 C17.- | C16.2 40.39,36.83 39.12,35.56 C18.2 41.27,31.88 41.91,31.24 41.91,28.68 IC3.1 | 21.15,25.91 C7.- | 21.15,31.75 21.59,31.75 | C20.2 31.5,53.09 31.5,45.97 30.23,44.7 30.23,43.43 28.96,42.16 C14.2 | 22.86,68.58 20.83,68.58 v20.57,68.83 | v13.46,39.62 16,39.62 16.07,39.69 | v49.28,85.34 51.56,82.8 51.56,78.75 LED10.C LED11.C 51.55,72.4 51.56,72.39 52.07,72.39 56.9,72.39 v58.17,70.87
  Top 0.813: C11.2 44.97,37.99 C10.- 42.9,37.97 C16.2 C12.2 34.42,37.97 v32.77,37.08 30.35,40.77 C14.2 17.15,40.77 16.07,39.69 C13.- 21.15,31.75 21.15,25.91 | C15.- 57.09,32.13 61.98,37.02 | 21.59,31.75 28.63,31.75 IC2.1
  Bottom 0.152: R1.2 28.46,67 28.46,66.58
  Bottom 0.254: v45.21,77.47 v45.21,74.17 | 28.45,64.01 28.45,66.97 28.46,67 | v47.24,58.17 v47.24,54.61 47.24,54.36
  Bottom 0.406: v28.45,61.98 28.45,64.01 | 28.45,64.01 28.45,66.99 28.46,67 | 28.45,64.01 30.48,64.01 v31.24,63.25 | v24.38,67.31 R1.2
  Bottom 0.61: v20.57,68.83 20.57,71.17 SG1.- | SG1.- 13.01,73.66 T1.E 9.65,73.66 7.87,71.88 7.87,70.36 6.6,68.83 6.1,67.82 4.32,59.69 4.57,49.53 v13.46,39.62 | JP3.1 26.26,74.83 22.86,78.23 17.58,78.23 SG1.- | T2.E 31.5,89.15 31.75,89.41 47.75,89.41 T3.E v49.28,85.34 | T4.E 60.96,73.66 v58.17,70.87 JP1.1
  Bottom 0.813: JP1.1 JP5.1 JP4.1 | JP2.2 33.02,37.34 v32.77,37.08
  pour Top (isolate 0.508): 4.32,94.23 61.21,94.23 85.6,69.85 85.6,21.08 74.17,9.65 19.05,9.65 -4.83,33.53 -4.83,85.09
  pour Bottom (isolate 0.508): 1.52,97.03 61.72,97.03 91.19,67.56 91.19,18.8 78.23,5.84 16,5.84 -6.6,28.45 -6.6,88.9
GND1  (via drill 0.35)
  Top 0.152: R7.2 129.27,67 129.27,66.58
  Top 0.254: v112.52,77.47 v112.52,74.17 | 129.29,64.01 129.29,66.97 129.27,67 | v110.49,58.17 v110.49,54.61 110.49,54.36
  Top 0.406: v129.29,61.98 129.29,64.01 | 129.29,64.01 129.29,66.99 129.27,67 | 129.29,64.01 127.25,64.01 v126.49,63.25 | v133.35,67.31 R7.2
  Top 0.61: v137.16,68.83 137.16,71.17 SG2.- | SG2.- 144.73,73.66 T5.E 148.08,73.66 149.86,71.88 149.86,70.36 151.13,68.83 151.64,67.82 153.42,59.69 153.16,49.53 v144.27,39.62 | JP8.1 131.47,74.83 134.87,78.23 140.16,78.23 SG2.- | T6.E 126.24,89.15 125.98,89.41 109.98,89.41 T7.E v108.46,85.34 | T8.E 96.77,73.66 v99.57,70.87 JP6.1
  Top 0.813: JP6.1 JP10.1 JP9.1 | JP7.2 124.71,37.34 v124.97,37.08
  Bottom 0.152: 117.35,67.31 115.57,65.53 115.6,65.5 U2.12 | U2.63 124.41,64.06 | 124.41,64.06 124.59,63.88 | 125.22,61.21 125.09,61.21 | 124.41,64.06 125.68,64.06
  Bottom 0.254: U2.47 120.6,70.56 117.35,67.31 | 117.35,67.31 120.6,64.06 U2.63 125.68,64.06 v126.49,63.25 | U2.12 115.6,65.56 117.35,67.31 | U2.18 114.1,64.06 115.57,65.53 | 135.06,61.91 135.13,61.98 | IC4.5 IC4.6 IC4.7 IC4.8 | 106.17,72.39 108.71,72.39 110.54,70.56 U2.31 | C36.2 110.74,58.42 v110.49,58.17 | 117.35,67.31 110.49,74.17 | 126.24,53.09 129.54,53.09 131.32,51.31 | 124.59,63.88 125.48,62.99 125.48,61.47 125.22,61.21 | 125.09,61.21 123.19,61.21 122.82,61.58 C37.2
  Bottom 0.406: LED20.C LED19.C LED18.C | U$3.3 138.78,64.26 | 138.78,64.26 U$3.4 | U$3.9 138.78,60.45 | 138.78,60.45 U$3.10 | 138.78,64.26 135.13,64.26 | 138.78,60.45 135.13,60.45 135.13,61.98 135.13,64.26 | LED18.C 134.87,68.58 135.13,68.33 135.13,64.26 | v110.49,54.61 110.49,49.94 | C31.2 109.73,49.15 110.49,49.94 | IC4.8 112.67,77.32 v112.52,77.47 | v112.52,74.17 110.49,74.17 108.71,72.39 105.66,72.39 | U$3.18 129.36,61.91 v129.29,61.98 | LED18.C 133.34,67.32 v133.35,67.31 | C33.2 122.19,47.48 122.17,45.97 126.24,45.97 | S4.P$2 115.47,46.38 115.82,46.74 C30.2 112.38,49.92 110.49,49.94 | LED17.C 108.57,20.08 104.9,23.75 102.3,23.75 C26.-
  Bottom 0.61: C22.2 111.36,38.49 111,38.86 111,41.4 110.89,41.52 C31.2 C35.2 C8.2 C34.2 96.63,41.52 95.76,40.64 95.76,37.02 C28.- | C27.2 117.35,36.83 118.62,35.56 C29.2 116.46,31.88 115.82,31.24 115.82,28.68 IC6.1 | 136.59,25.91 C38.- | 136.59,31.75 136.14,31.75 | C32.2 126.24,53.09 126.24,45.97 127.51,44.7 127.51,43.43 128.78,42.16 C25.2 | 134.87,68.58 136.91,68.58 v137.16,68.83 | v144.27,39.62 141.73,39.62 141.67,39.69 | v108.46,85.34 106.17,82.8 106.17,78.75 LED12.C LED13.C 106.18,72.4 106.17,72.39 105.66,72.39 100.84,72.39 v99.57,70.87
  Bottom 0.813: C22.2 112.77,37.99 C9.- 114.83,37.97 C27.2 C23.2 123.31,37.97 v124.97,37.08 127.38,40.77 C25.2 140.59,40.77 141.67,39.69 C24.- 136.59,31.75 136.59,25.91 | C26.- 100.65,32.13 95.76,37.02 | 136.14,31.75 129.11,31.75 IC5.1
  pour Bottom (isolate 0.508): 153.42,94.23 96.52,94.23 72.14,69.85 72.14,21.08 83.57,9.65 138.68,9.65 162.56,33.53 162.56,85.09
  pour Top (isolate 0.508): 156.21,97.03 96.01,97.03 66.55,67.56 66.55,18.8 79.5,5.84 141.73,5.84 164.34,28.45 164.34,88.9
IN1_A
  Top 0.152: 37.14,61.01 U1.2
  Top 0.254: U$1.21 29.24,63.85 32.89,60.2 36.32,60.2 37.14,61.01
IN1_A1
  Bottom 0.152: 120.6,61.01 U2.2
  Bottom 0.254: U$3.21 128.5,63.85 124.84,60.2 121.41,60.2 120.6,61.01
IN1_B
  Top 0.152: 29.93,61.26 29.84,61.26
  Top 0.254: U1.3 37.64,60.62 36.75,59.74 31.45,59.74 29.93,61.26 | 29.84,61.26 U$1.17
IN1_B1
  Bottom 0.152: 127.8,61.26 127.89,61.26
  Bottom 0.254: U2.3 120.1,60.62 120.98,59.74 126.29,59.74 127.8,61.26 | 127.89,61.26 U$3.17
IN2_A
  Top 0.254: U$1.22 34.63,64.5 U1.62
IN2_A1
  Bottom 0.254: U$3.22 123.1,64.5 U2.62
IN2_B
  Top 0.254: U$1.16 29.95,60.6 31.37,59.18 37.08,59.18 38.14,60.23 U1.4
IN2_B1
  Bottom 0.254: U$3.16 127.79,60.6 126.36,59.18 120.65,59.18 119.6,60.23 U2.4
LED1
  Top 0.152: 46.74,76.2 R20.1
  Top 0.254: U1.39 41.14,74.41 41.66,74.93 44.96,74.93 46.23,76.2 46.74,76.2
LED2
  Top 0.152: 41.4,75.44 41.66,75.44
  Top 0.254: U1.40 40.64,74.67 41.4,75.44 | 41.66,75.44 44.7,75.44 45.97,76.71 45.97,78.49 46.23,78.74 R15.1
LED3
  Top 0.152: 34.29,70.06 U1.51 | 33.53,71.88 33.53,71.75
  Top 0.254: R16.1 33.02,72.39 33.53,71.88 | 33.53,71.75 33.53,70.36 33.83,70.06 34.29,70.06
LED4
  Top 0.254: U1.52 33.44,69.56 32.77,70.23 32.77,70.87 32.51,71.12 R17.1
LED5
  Top 0.254: U1.53 32.54,69.06 31.75,69.85 R18.1
LED6
  Bottom 0.152: 116.33,75.44 116.08,75.44
  Bottom 0.254: U2.40 117.1,74.67 116.33,75.44 | 116.08,75.44 113.03,75.44 111.76,76.71 111.76,78.49 111.51,78.74 R21.1
LED7
  Bottom 0.152: 123.44,70.06 U2.51 | 124.21,71.88 124.21,71.75
  Bottom 0.254: R22.1 124.71,72.39 124.21,71.88 | 124.21,71.75 124.21,70.36 123.91,70.06 123.44,70.06
LED8
  Bottom 0.254: U2.52 124.3,69.56 124.97,70.23 124.97,70.87 125.22,71.12 R23.1
LED9
  Bottom 0.254: U2.53 125.19,69.06 125.98,69.85 R24.1
LED10
  Bottom 0.152: 111,76.2 R26.1
  Bottom 0.254: U2.39 116.6,74.41 116.08,74.93 112.78,74.93 111.51,76.2 111,76.2
N$1  (via drill 0.35)
  Top 0.254: U1.60 33.27,65.56
  Top 0.406: v31.75,65.79 31.85,65.56 33.27,65.56
  Bottom 0.254: 30.23,67.31 R1.1
  Bottom 0.406: v31.75,65.79 31.75,67.06 31.5,67.31 30.23,67.31
N$2
  Top 0.254: L1.2 43.32,56.01 C5.1 43.32,59.3 42.64,59.98 U1.13
N$3
  Top 0.254: LED7.A 26.92,68.58 28.19,69.85 R18.2
N$4
  Top 0.254: LED8.A 26.92,69.85 28.19,71.12 R17.2
N$5
  Top 0.254: LED9.A 26.92,71.12 28.19,72.39 R16.2
N$6
  Top 0.254: R15.2 LED10.A
N$7
  Top 0.406: R6.1 45.47,23.88 45.72,23.62 LED5.A
N$8  (via drill 0.35)
  Top 0.406: v11.94,75.18 11.94,67.82 v11.43,67.31 | v33.02,83.31 33.17,83.46 IC1.16
  Bottom 0.406: LED1.K v11.43,67.31 | v11.94,75.18 19.3,82.55 26.16,82.55 26.92,83.31 v33.02,83.31
N$9
  Top 0.406: U$1.2 18.95,65.53 U$1.1
  Top 0.813: MOT1_A.1 18.03,67.31 18.95,66.39 U$1.1
N$10
  Top 0.254: U$1.5 18.95,62.87 U$1.6
  Top 0.406: MOT2_A.1 17.82,63.2 U$1.5
  Top 0.813: 18.95,62.87 18.16,62.87 MOT2_A.1
N$11
  Top 0.254: U$1.7 18.95,61.72 U$1.8
  Top 0.406: U$1.8 16.55,61.26 MOT2_B.1
  Top 0.813: MOT2_B.1 17.14,60.96 17.91,61.72 18.95,61.72
N$12
  Top 0.254: U$1.11 18.95,59.05 U$1.12
  Top 0.406: U$1.12 17.51,58.66 17.27,58.42 MOT1_B.1
  Top 0.813: 18.95,59.05 18.03,59.05 17.4,58.42 MOT1_B.1
N$13  (via drill 0.35)
  Top 0.406: IC1.15 36.7,84.71 36.32,85.09 32.51,85.09 v31.75,84.33
  Bottom 0.406: LED2.K 26.42,85.6 27.69,84.33 v31.75,84.33
N$14  (via drill 0.35)
  Top 0.254: 37.97,84.2 IC1.14
  Top 0.406: v47.5,84.33 45.97,85.85 39.62,85.85 37.97,84.2
  Bottom 0.406: LED3.K 49.78,84.33 v47.5,84.33
N$15  (via drill 0.35)
  Top 0.254: 39.24,84.45 IC1.13
  Top 0.406: v66.55,67.31 66.55,75.18 59.18,82.55 v58.67,82.55 | v50.29,82.55 49.53,83.31 46.74,83.31 44.96,85.09 39.88,85.09 39.24,84.45
  Bottom 0.406: LED4.K v66.55,67.31 | v58.67,82.55 v50.29,82.55
N$16  (via drill 0.35)
  Top 0.254: 127.51,67.31 R7.1
  Top 0.406: v125.98,65.79 125.98,67.06 126.24,67.31 127.51,67.31
  Bottom 0.254: U2.60 124.46,65.56
  Bottom 0.406: v125.98,65.79 125.89,65.56 124.46,65.56
N$17
  Bottom 0.61: R2.1 LED1.A
N$18
  Bottom 0.61: LED2.A 23.88,85.24 R3.1
N$19
  Bottom 0.61: LED3.A R4.1
N$20
  Bottom 0.61: R5.1 LED4.A
N$21
  Bottom 0.254: L2.2 114.41,56.01 C36.1 114.41,59.3 115.1,59.98 U2.13
N$22
  Bottom 0.406: U$3.2 138.78,65.53 U$3.1
  Bottom 0.813: MOT1_A1.1 139.7,67.31 138.78,66.39 U$3.1
N$23
  Top 0.254: U1.5 38.61,60 36.65,58.04 34.61,58.04 32.76,56.19
  Top 0.61: CR1.P$2 32.76,56.19 32.52,56.51 C20.1
N$24
  Top 0.305: U1.6 39.14,59.58 38.8,59.24
  Top 0.406: 38.8,59.24 37.72,58.17 36.83,57.4 36.07,56.64 36.07,51.7 CR1.P$1
  Top 0.61: CR1.P$1 33.78,49.92 C21.1
N$25
  Bottom 0.254: U$3.5 138.78,62.87 U$3.6
  Bottom 0.406: MOT2_A1.1 139.91,63.2 U$3.5
  Bottom 0.813: 138.78,62.87 139.57,62.87 MOT2_A1.1
N$26
  Top 0.254: R20.2 LED11.A
N$27
  Bottom 0.254: U$3.7 138.78,61.72 U$3.8
  Bottom 0.406: U$3.8 141.18,61.26 MOT2_B1.1
  Bottom 0.813: MOT2_B1.1 140.59,60.96 139.83,61.72 138.78,61.72
N$28
  Bottom 0.254: U$3.11 138.78,59.05 U$3.12
  Bottom 0.406: U$3.12 140.23,58.66 140.46,58.42 MOT1_B1.1
  Bottom 0.813: 138.78,59.05 139.7,59.05 140.34,58.42 MOT1_B1.1
N$29  (via drill 0.35)
  Top 0.406: LED6.K v146.3,67.31 | v145.8,75.18 138.43,82.55 131.57,82.55 130.81,83.31 v124.71,83.31
  Bottom 0.406: v145.8,75.18 145.8,67.82 v146.3,67.31 | v124.71,83.31 124.56,83.46 IC4.16
N$30  (via drill 0.35)
  Top 0.406: LED14.K 131.32,85.6 130.05,84.33 v125.98,84.33
  Bottom 0.406: IC4.15 121.03,84.71 121.41,85.09 125.22,85.09 v125.98,84.33
N$31  (via drill 0.35)
  Top 0.406: LED15.K 107.95,84.33 v110.24,84.33
  Bottom 0.254: 119.76,84.2 IC4.14
  Bottom 0.406: v110.24,84.33 111.76,85.85 118.11,85.85 119.76,84.2
N$32  (via drill 0.35)
  Top 0.406: LED16.K v91.19,67.31 | v99.06,82.55 v107.44,82.55
  Bottom 0.254: 118.49,84.45 IC4.13
  Bottom 0.406: v91.19,67.31 91.19,75.18 98.55,82.55 v99.06,82.55 | v107.44,82.55 108.2,83.31 111,83.31 112.78,85.09 117.86,85.09 118.49,84.45
N$33
  Top 0.61: R25.1 LED6.A
N$34
  Top 0.61: LED14.A 133.86,85.24 R27.1
N$35
  Top 0.61: LED15.A R28.1
N$36
  Top 0.61: R29.1 LED16.A
N$37
  Bottom 0.254: U2.5 119.12,60 121.08,58.04 123.12,58.04 124.97,56.19
  Bottom 0.61: CR2.P$2 124.97,56.19 125.22,56.51 C32.1
N$38
  Bottom 0.305: U2.6 118.6,59.58 118.94,59.24
  Bottom 0.406: 118.94,59.24 120.02,58.17 120.9,57.4 121.67,56.64 121.67,51.7 CR2.P$1
  Bottom 0.61: CR2.P$1 123.95,49.92 C33.1
N$39
  Bottom 0.254: LED18.A 130.81,68.58 129.54,69.85 R24.2
N$40
  Bottom 0.254: LED19.A 130.81,69.85 129.54,71.12 R23.2
N$41
  Bottom 0.254: LED20.A 130.81,71.12 129.54,72.39 R22.2
N$42
  Bottom 0.254: R21.2 LED12.A
N$43
  Bottom 0.254: R26.2 LED13.A
N$44
  Bottom 0.406: R30.1 112.27,23.88 112.01,23.62 LED17.A
PWM_A
  Top 0.152: 26.67,65.16 U$1.23
  Top 0.254: U1.59 33,66.06 32.58,66.48 29.15,66.48 27.82,65.16 26.67,65.16
PWM_A1
  Bottom 0.152: 131.06,65.16 U$3.23
  Bottom 0.254: U2.59 124.73,66.06 125.16,66.48 128.59,66.48 129.92,65.16 131.06,65.16
PWM_B
  Top 0.152: 25.4,59.94 25.53,59.94 | 26.04,59.94 U$1.15
  Top 0.254: U1.58 33.52,66.56 33.02,67.06 26.16,67.06 24.89,65.79 24.89,60.45 25.4,59.94 | 25.53,59.94 26.04,59.94
PWM_B1
  Bottom 0.152: 132.33,59.94 132.21,59.94 | 131.7,59.94 131.48,59.94 U$3.15
  Bottom 0.254: U2.58 124.22,66.56 124.71,67.06 131.57,67.06 132.84,65.79 132.84,60.45 132.33,59.94 | 132.21,59.94 131.7,59.94
RESET
  Top 0.305: U1.7 39.64,59.19 37.47,57.02
  Top 0.406: S2.P$1 35.97,44.86 37.47,46.35 | 37.47,46.35 40.64,49.53 40.64,51.28 41.03,51.67 C19.1 43.32,53.09 R8.1 | 37.47,57.02 37.47,46.35
RESET1
  Bottom 0.305: U2.7 118.1,59.19 120.27,57.02
  Bottom 0.406: S4.P$1 121.77,44.86 120.27,46.35 | 120.27,46.35 117.09,49.53 117.09,51.28 116.7,51.67 C30.1 114.41,53.09 R31.1 | 120.27,57.02 120.27,46.35
RX  (via drill 0.35)
  Top 0.254: U1.30 47.45,70.06 49.02,71.63
  Top 0.406: v55.63,70.87 54.86,71.63 49.02,71.63
  Bottom 0.406: v55.63,70.87 JP1.2
RX1  (via drill 0.35)
  Top 0.406: v102.11,70.87 JP6.2
  Bottom 0.254: U2.30 110.28,70.06 108.71,71.63
  Bottom 0.406: v102.11,70.87 102.87,71.63 108.71,71.63
SWCLK  (via drill 0.35)
  Top 0.152: 34.69,71.63 34.69,71.74
  Top 0.254: U1.49 34.69,71.63
  Top 0.406: v29.97,74.68 30.99,73.66 32.77,73.66 34.69,71.74
  Bottom 0.406: JP3.2 28.08,76.57 v29.97,74.68
SWCLK1  (via drill 0.35)
  Top 0.406: JP8.2 129.66,76.57 v127.76,74.68
  Bottom 0.152: 123.05,71.63 123.05,71.74
  Bottom 0.254: U2.49 123.05,71.63
  Bottom 0.406: v127.76,74.68 126.75,73.66 124.97,73.66 123.05,71.74
SWDIO  (via drill 0.35)
  Top 0.254: 37.34,74.17 37.64,73.87 U1.46
  Top 0.406: v31.75,76.45 34.04,74.17 37.34,74.17
  Bottom 0.406: JP3.3 29.85,78.35 v31.75,76.45
SWDIO1  (via drill 0.35)
  Top 0.406: JP8.3 127.88,78.35 v125.98,76.45
  Bottom 0.254: 120.4,74.17 120.1,73.87 U2.46
  Bottom 0.406: v125.98,76.45 123.7,74.17 120.4,74.17
TX  (via drill 0.35)
  Top 0.254: U1.29 47.97,69.56 49.28,70.87
  Top 0.406: 49.28,70.87 v53.09,70.87
  Bottom 0.406: v53.09,70.87 JP1.3
TX1  (via drill 0.35)
  Top 0.406: v104.65,70.87 JP6.3
  Bottom 0.254: U2.29 109.76,69.56 108.46,70.87
  Bottom 0.406: 108.46,70.87 v104.65,70.87
V+  (via drill 0.35)
  Top 0.254: U$1.14 U$1.13 26.26,57.91 26.26,57.81
  Top 0.406: v27.43,57.4 26.67,57.4 26.26,57.81 | 26.26,57.91 U$1.14 | v27.43,66.29 26.75,66.29 U$1.24 | v41.91,25.4 41.91,25.18 R6.2
  Top 0.61: IC3.3 47.24,28.65 | 48.77,28.19 49.02,27.94 49.02,25.46 | 49.02,25.46 C15.+ | 48.51,25.4 48.96,25.4 49.02,25.46 | v42.93,47.5 43.27,47.84 45.47,47.84 45.47,40.89 | C12.1 C16.1 42.9,40.77 C10.+ 45.32,40.74 45.47,40.89 | 45.47,40.89 C11.1
  Top 0.813: C7.+ 36.32,25.4 | 48.51,25.4 v41.91,25.4 36.32,25.4 | IC2.3 36.35,25.43 36.32,25.4 | 47.24,28.65 48.31,28.65 48.77,28.19 49.09,27.88 C15.+
  Bottom 0.813: v27.43,66.29 v27.43,57.4 27.43,52.83 30.73,49.53 41.66,49.53 42.93,48.26 v42.93,47.5 43.18,47.24 43.18,27.94 41.91,26.67 v41.91,25.4 41.66,25.15 S1.3
V+1  (via drill 0.35)
  Top 0.813: v130.3,66.29 v130.3,57.4 130.3,52.83 127,49.53 116.08,49.53 114.81,48.26 v114.81,47.5 114.55,47.24 114.55,27.94 115.82,26.67 v115.82,25.4 116.08,25.15 S3.3
  Bottom 0.254: U$3.14 U$3.13 131.47,57.91 131.47,57.81
  Bottom 0.406: v130.3,57.4 131.06,57.4 131.47,57.81 | 131.47,57.91 U$3.14 | v130.3,66.29 130.98,66.29 U$3.24 | v115.82,25.4 115.82,25.18 R30.2
  Bottom 0.61: IC6.3 110.49,28.65 | 108.97,28.19 108.71,27.94 108.71,25.46 | 108.71,25.46 C26.+ | 109.22,25.4 108.78,25.4 108.71,25.46 | v114.81,47.5 114.47,47.84 112.27,47.84 112.27,40.89 | C23.1 C27.1 114.83,40.77 C9.+ 112.42,40.74 112.27,40.89 | 112.27,40.89 C22.1
  Bottom 0.813: C38.+ 121.41,25.4 | 109.22,25.4 v115.82,25.4 121.41,25.4 | IC5.3 121.39,25.43 121.41,25.4 | 110.49,28.65 109.42,28.65 108.97,28.19 108.65,27.88 C26.+

## Text on the board
Top: SynerMicromouse / Ostrowski&Mróz
Bottom: SynerMicromouse / Ostrowski&Mróz